# EAGLE board BR012_MKL_3310_Tender_Lichtplatine_J0_001_02_01 (EAGLE 5.10)
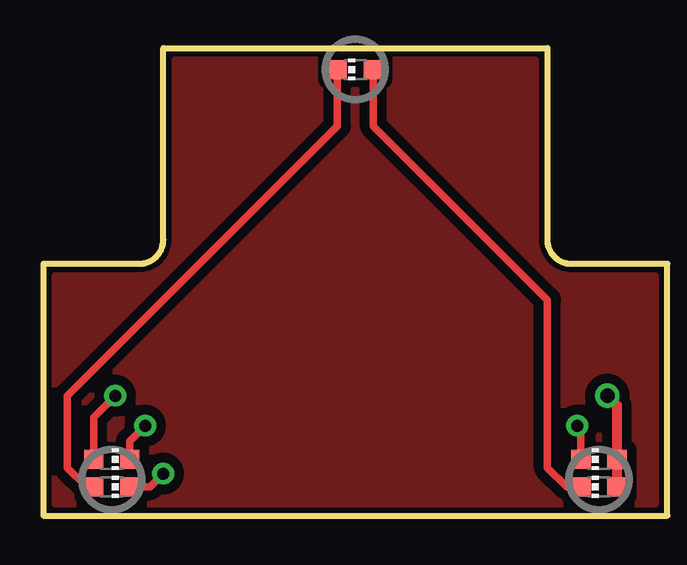
[diagram p0: board, top side]
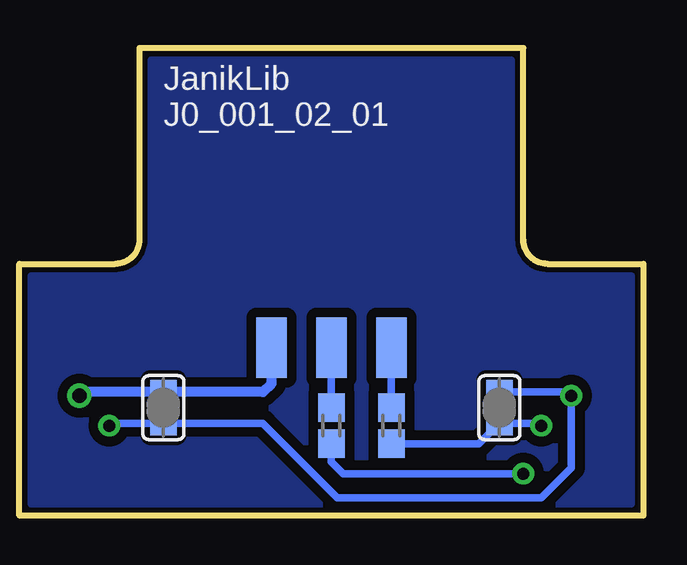
[diagram p1: board, bottom side, seen from below]

No outline drawn. Coordinates in mm, seen from the top.
Copper layers (1*16): Top 0.035mm / dielectric 1.5mm / Bottom 0.035mm
Design rules "default *": minimum track width 7mil, minimum drill 0.6mm, track to track 8mil, track to pad 8mil, pad to pad 8mil, via to via 8mil, smd to smd 8mil, copper to edge 40mil, drill to drill 8mil, minimum pad ring 10mil, minimum via ring 8mil, stop-mask expansion 4mil, vias tented up to drill 0mil, thermal gap 10mil
Milling: 10 lines

## Footprints (pad centres in the part's own frame; a part is rotated, then mirrored left to right if it is on the bottom)
CHIP-LED0603 = smd 0.8 x 0.8: A 0,-0.75; C 0,0.75
SMD1,27-2,54 = smd 1.27 x 2.54: 1 0,0
R0603S = smd 1.2 x 1.1: 1 -0.75,0; 2 0.75,0
SJS = smd 1 x 1.1: 1 -0.65,0; 2 0.65,0

## Placement (x,y rotation side)
AB1  [CHIP-LED0603]  2.85,1.2 270 top
AB2  [CHIP-LED0603]  23.15,1.2 90 top
AB3  [CHIP-LED0603]  13,18.6 90 top
HI  [SMD1,27-2,54]  10.5,7 180 bottom
PLUS  [SMD1,27-2,54]  15.5,7 180 bottom
R1  3k6  [R0603S]  13,3.75 90 bottom
R2  10k  [R0603S]  10.5,3.75 90 bottom
RUL  [CHIP-LED0603]  2.85,2.35 270 top
RUR  [CHIP-LED0603]  23.15,2.35 90 top
SJ1  [SJS]  20,4.5 270 bottom
SJ2  [SJS]  6,4.5 270 bottom
VO  [SMD1,27-2,54]  13,7 180 bottom

## Library data of the parts
AB1-AB3 RUL RUR = led
HI PLUS VO = wirepad
R1 R2 = rcl
SJ1 SJ2 = jumper

## Nets
N$1: AB2.C AB3.A
N$2: R1.2 VO.1
N$3: RUL.A RUR.C SJ1.2 SJ2.1
N$4: AB1.A AB3.C
N$5: AB1.C R1.1
N$6: HI.1 R2.2
N$10: AB2.A PLUS.1 RUR.A SJ1.1
N$13: R2.1 RUL.C SJ2.2

## Tracks (layer width: path | path; a pad name or v marks a point on that pad's centre or on a via)
N$1
  Top 0.305: AB2.C 21.8,1.2 21,2 21,9 13.75,16.25 AB3.A
N$2
  Bottom 0.305: R1.2 VO.1
N$3  (via drill 0.5)
  Top 0.305: RUL.A 2.1,4.1 v3,5 | RUR.C 22.4,3.6 v22.25,3.75
  Bottom 0.305: SJ2.1 3.15,5.15 v3,5 3,2 4.25,0.75 12.75,0.75 15.85,3.85 SJ1.2 22.15,3.85 v22.25,3.75
N$4
  Top 0.305: AB1.A 1.8,1.2 1,2 1,5 12.25,16.25 AB3.C
N$5  (via drill 0.5)
  Top 0.305: v5,1.75 4.45,1.2 AB1.C
  Bottom 0.305: R1.1 13,2.25 12.5,1.75 v5,1.75
N$6
  Bottom 0.305: R2.2 HI.1
N$7
  pour Bottom (isolate 0.406): 25.5,10 22,10 arc-90 20.5,11.5 20.5,19 5.5,19 5.5,11.5 arc-90 4,10 0.5,10 0.5,0.5 25.5,0.5
  pour Top (isolate 0.406): 25.5,10 22,10 arc-90 20.5,11.5 20.5,19 5.5,19 5.5,11.5 arc-90 4,10 0.5,10 0.5,0.5 25.5,0.5
N$10  (via drill 0.6)
  Top 0.406: AB2.A RUR.A 23.9,4.6 v23.5,5
  Bottom 0.406: v23.5,5 23.35,5.15 SJ1.1 15.85,5.15 15.5,5.5 PLUS.1
N$13  (via drill 0.5)
  Top 0.305: RUL.C 3.6,3.1 v4.25,3.75
  Bottom 0.305: v4.25,3.75 4.35,3.85 SJ2.2 6.85,3 R2.1

## Text on the board
bNames: JanikLib | J0_001_02_01
tStop: BR012 LED | Für Märklin 3310 | design by Janik Merz
bStop: hi | vo | + | BR012 LED